# Altium PCB PCB.PcbDoc
Units mm, origin at the board's own origin, x right, y up, seen from the top; angles counter-clockwise.
Board outline 41.02 x 35.05 mm, 2 copper layers (Top Layer, Bottom Layer); 21 components, 18 nets, 96 pads, 16 vias.
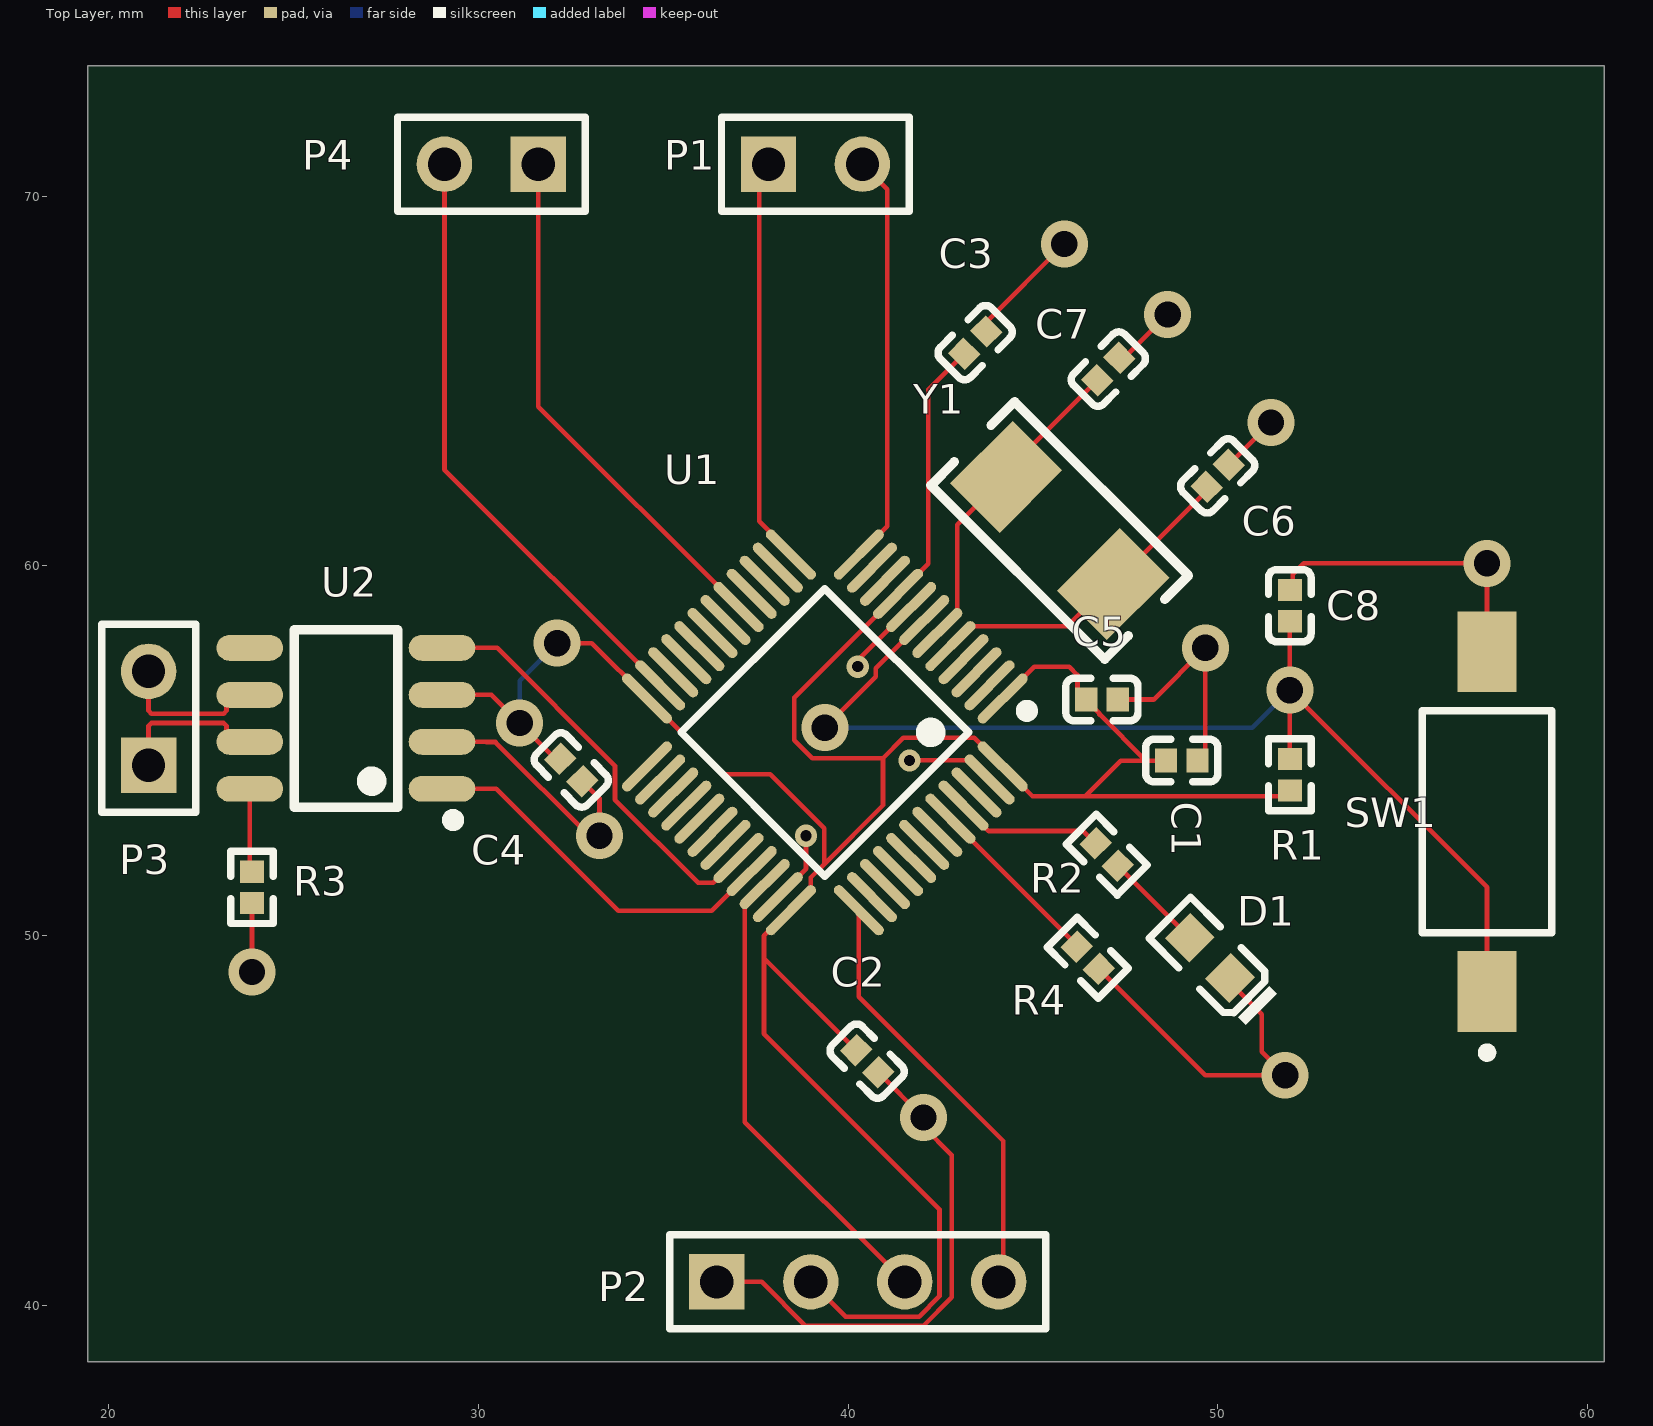
[diagram p0: Top Layer view]
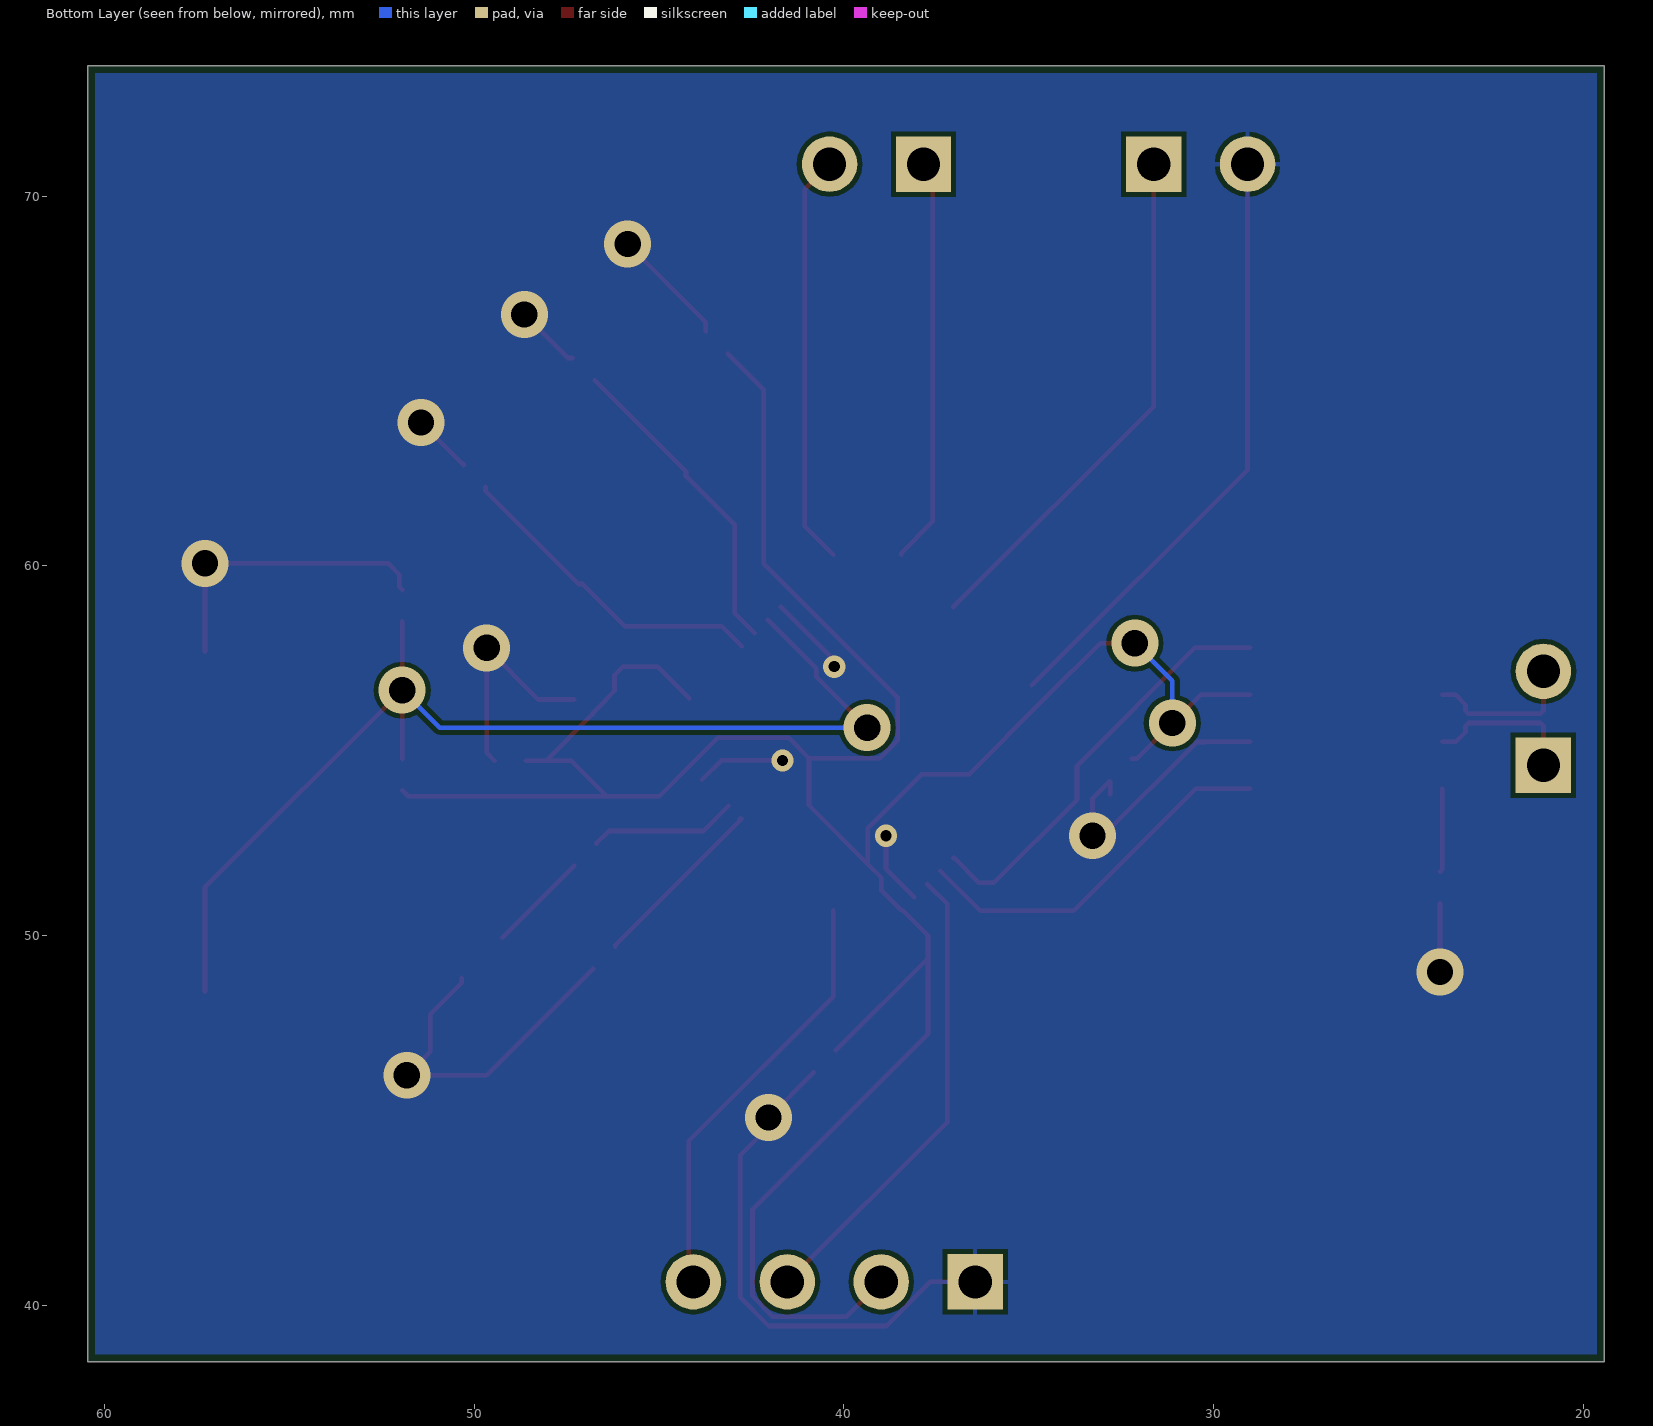
[diagram p1: Bottom Layer view, seen from below]
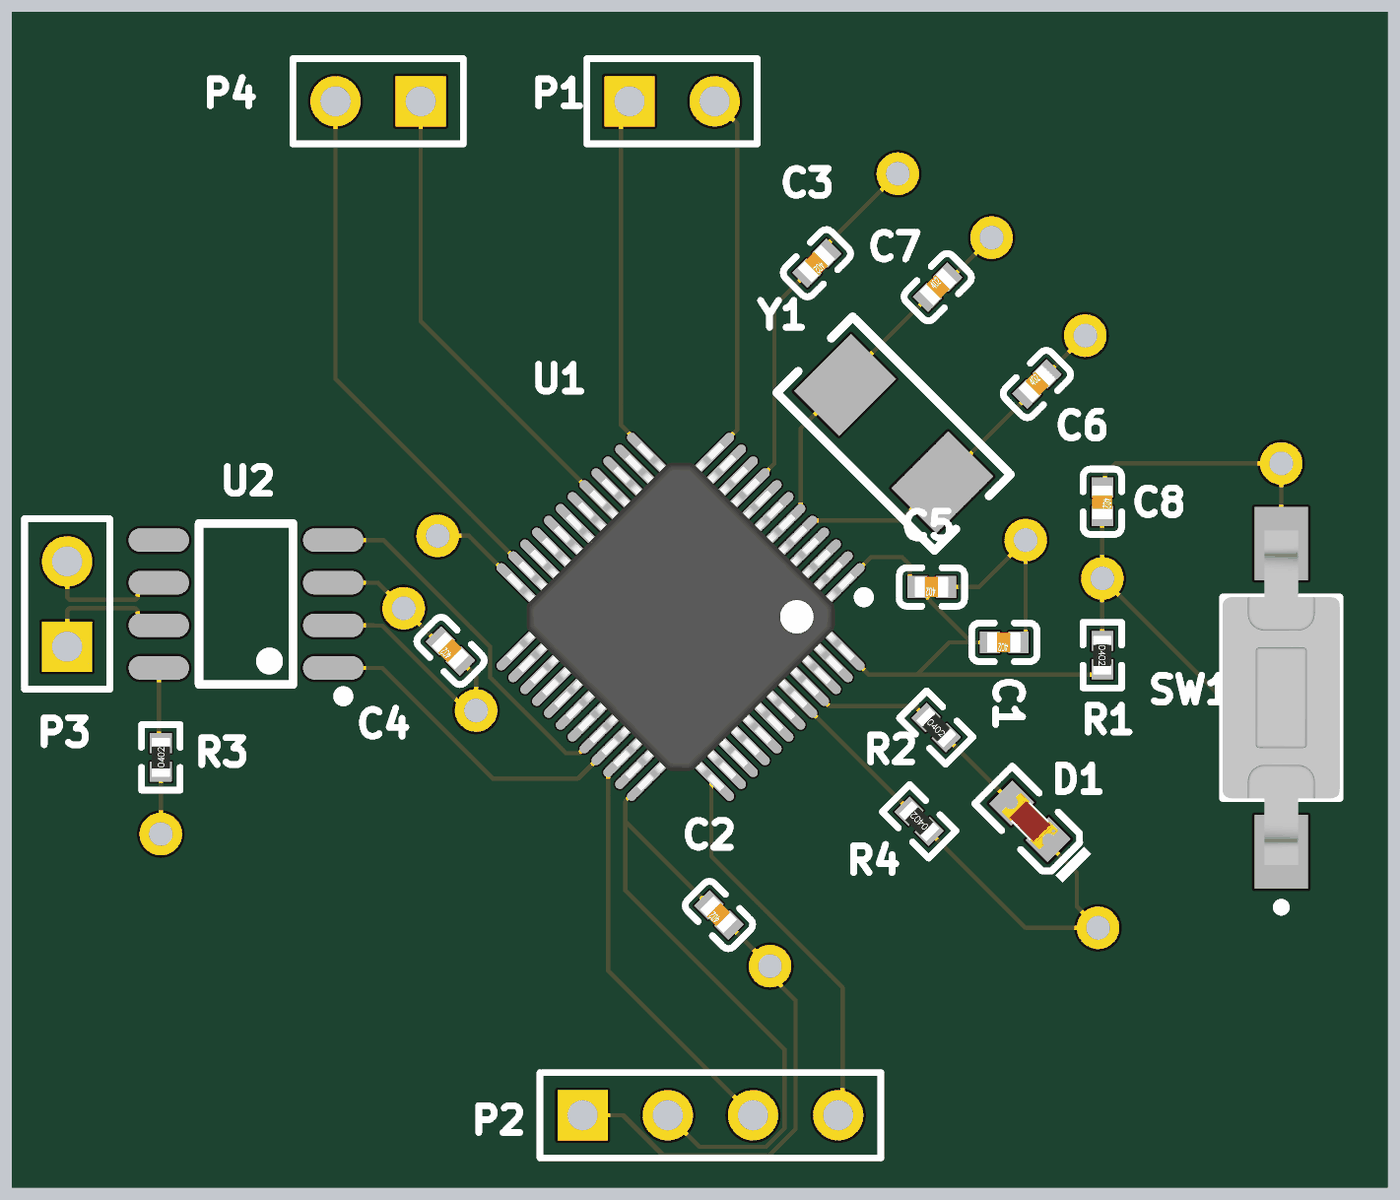
[diagram p2: 3D render of the assembled board from above, using the file's embedded part models]

## Layer stack, top to bottom
Top Solder: solder mask 0.0102, Solder Resist, Dk 3.5
Top Layer: signal copper 0.0356
Dielectric 1: dielectric 0.32, FR-4, Dk 4.8
Bottom Layer: signal copper 0.0356
Bottom Solder: solder mask 0.0102, Solder Resist, Dk 3.5

## Board outline
19.431,38.481 60.452,38.481 60.452,73.533 19.431,73.533

## Design rules (kind name [scope] priority, off if disabled: settings)
BoardOutlineClearance [All] p1: gap=0.2 ignorepadtopadclearanceinfootprint=FALSE
Clearance [All] p1: gap=0.127 ignorepadtopadclearanceinfootprint=FALSE except(0.25: Arc-Hole Track-Hole SMDPad-Hole THPad-Hole Via-Hole Fill-Hole Poly-Hole Region-Hole Text-Hole)
ComponentClearance [All] p1: gap=0.127 collisioncheckmode=3 verticalgap=0.127 showdistances=TRUE
DiffPairsRouting [All] p1: maxlimit=0.254 minlimit=0.127 mostfreqgap=0.127 toplayer_minwidth=0.127 toplayer_maxwidth=25.4 toplayer_prefwidth=0.127 bottomlayer_minwidth=0.127 bottomlayer_maxwidth=25.4 bottomlayer_prefwidth=0.127 maxuncoupledlength=12.7
Height [All] p1: minheight=0 maxheight=1816.048 prefheight=12.7
HoleSize [All] p1: absolutevalues=TRUE maxlimit=6.3 minlimit=0.3 maxpercent=80.000 minpercent=20.000
HoleToHoleClearance [All] p1: gap=0.25 allowstackedmicrovias=FALSE
MinimumAnnularRing [All] p1: minimumring=0.076
MinimumSolderMaskSliver [All] p1: minsoldermaskwidth=0
PlaneClearance [All] p1: clearance=0.127
PlaneConnect PlaneConnectPowerPads [InPadClass('PowerPads')] p1: planeconnectstyle=Direct reliefexpansion=0.508 reliefentries=4 reliefconductorwidth=0.254 reliefairgap=0.254
PlaneConnect [All] p2: pad.planeconnectstyle=Relief pad.reliefexpansion=0.3 pad.reliefentries=4 pad.reliefconductorwidth=0.127 pad.reliefairgap=0.127 via.planeconnectstyle=Direct via.reliefexpansion=0.3 via.reliefentries=4 via.reliefconductorwidth=0.127 via.reliefairgap=0.127
PolygonConnect PolygonConnectPowerPads [All vs (InPadClass('PowerPads'))] p1: connectstyle=Direct reliefconductorwidth=0.254 reliefentries=4 polygonreliefangle="90 Angle" airgapwidth=0.254
PolygonConnect [All] p2: thpad.connectstyle=Relief thpad.reliefconductorwidth=0.127 thpad.reliefentries=4 thpad.polygonreliefangle="90 Angle" thpad.airgapwidth=0.127 smdpad.connectstyle=Relief smdpad.reliefconductorwidth=0.127 smdpad.reliefentries=4 smdpad.polygonreliefangle="90 Angle" smdpad.airgapwidth=0.127 via.connectstyle=Direct via.reliefconductorwidth=0.127 via.reliefentries=4 via.polygonreliefangle="90 Angle" via.airgapwidth=0.127
RoutingVias [All] p1: holewidth=0.3 width=0.6 viastyle="Through Hole" minholewidth=0.3 minwidth=0.6 maxholewidth=0.6 maxwidth=6.6
SilkToSilkClearance [All] p1: silktosilkclearance=0
SilkToSolderMaskClearance [IsPad] p1: minsilkscreentomaskgap=0.127 clearancetoexposedcopper=TRUE
SolderMaskExpansion [All] p1: expansion=0.075 istentingtop=FALSE
Width [All] p1: maxlimit=25.4 minlimit=0.127 preferedwidth=0.127 minimp=50.000000 maximp=50.000000 favimp=50.000000
20 further rules are at their usual default settings.

## Classes and differential pairs
differential pair CAN: +CAN_P -CAN_N

## Components (designator, comment, footprint, x,y, rotation, side; value= is the part's Value field where it differs from the comment)
C1 "100nF" 0402_C 49.022,54.737 r180 top
C2 "100nF" 0402_C 40.513,46.609 r135 top
C3 "100nF" 0402_C 43.434,66.04 r225 top
C4 "100nF" 0402_C 32.512,54.483 r135 top
C5 "100nF" 0402_C 46.863,56.388 r180 top
C6 "30pF" 0402_C 49.991,62.437 r45 top
C7 "30pF" 0402_C 47.037,65.325 r45 top
C8 "100nF" 0402_C 51.943,58.928 r270 top
D1 "0603 Red" 0603_LED_S1 49.784,49.403 r135 top
P1 "Header 2" HDR1X2 37.846,70.866 r0 top
P2 "Header 4" HDR1X4 36.449,40.64 r0 top
P3 "Header 2" HDR1X2 21.082,54.61 r90 top
P4 "Header 2" HDR1X2 31.623,70.866 r180 top
R1 "100KΩ ±1%" 0402_R 51.943,54.356 r270 top
R2 "330Ω ±1%" 0402_R 46.99,52.197 r315 top
R3 "10KΩ ±1%" 0402_R 23.876,51.308 r90 top
R4 "100KΩ ±1%" 0402_R 46.482,49.403 r135 top
SW1 "FSMSM" TECO-FSMSM-2_V 57.277,53.086 r90 top
U1 "STM32F103C8T6" LQFP-48_7x7x05P 39.37,55.499 r135 top
U2 "CAN/SN65HVD230DR" SOIC-8_150mil 26.416,55.88 r90 top
Y1 "8MHz ±20ppm 20pF" SMD-5032_2P 45.72,60.96 r315 top

## Footprints (in the part's own frame and the unit in brackets; to place one, negate y for a bottom-side part, rotate by r counter-clockwise, add the part's x,y. Pads: shape width x height; smd on the part's side, far side on the other; paste and mask are expansions set on the pad)
0402_C [mm]
  rect 0.6x0.65 smd mask+0.051: 1(-0.425,0) 2(0.425,0)
  silkscreen extent -0.98,-0.58 0.98,0.58, body extent -0.48,-0.3 0.52,0.3, height 0.2
0402_R [mm]
  rect 0.6x0.65 smd mask+0.051: 1(-0.425,0) 2(0.425,0)
  silkscreen extent -0.98,-0.58 0.98,0.58, body extent -0.57,-0.27 0.58,0.28, height 0.41
0603_LED_S1 [mm]
  rect 0.93x0.98 smd: A(0.77,0) K(-0.77,0)
  silkscreen extent -1.98,-0.79 1.54,0.79, body extent -0.8,-0.4 0.8,0.4, height 0.6
HDR1X2 [mm] "Connector; Header; 2 Position"
  rect 1.5x1.5 hole 0.9: 1(0,0)
  round 1.5 hole 0.9: 2(2.54,0)
  silkscreen extent -1.27,-1.27 3.81,1.27
HDR1X4 [mm] "Connector; Header; 4 Position"
  rect 1.5x1.5 hole 0.9: 1(0,0)
  round 1.5 hole 0.9: 2(2.54,0) 3(5.08,0) 4(7.62,0)
  silkscreen extent -1.27,-1.27 8.89,1.27
LQFP-48_7x7x05P [mm]
  oval 0.28x1.8 smd mask+0.051: 1(-2.75,-4.05) 2(-2.25,-4.05) 3(-1.75,-4.05) 4(-1.25,-4.05) 5(-0.75,-4.05) 6(-0.25,-4.05) 7(0.25,-4.05) 8(0.75,-4.05) 9(1.25,-4.05) 10(1.75,-4.05) 11(2.25,-4.05) 12(2.75,-4.05) 25(2.75,4.05) 26(2.25,4.05) 27(1.75,4.05) 28(1.25,4.05) 29(0.75,4.05) 30(0.25,4.05) 31(-0.25,4.05) 32(-0.75,4.05) 33(-1.25,4.05) 34(-1.75,4.05) 35(-2.25,4.05) 36(-2.75,4.05)
  oval 1.8x0.28 smd mask+0.051: 13(4.05,-2.75) 14(4.05,-2.25) 15(4.05,-1.75) 16(4.05,-1.25) 17(4.05,-0.75) 18(4.05,-0.25) 19(4.05,0.25) 20(4.05,0.75) 21(4.05,1.25) 22(4.05,1.75) 23(4.05,2.25) 24(4.05,2.75) 37(-4.05,2.75) 38(-4.05,2.25) 39(-4.05,1.75) 40(-4.05,1.25) 41(-4.05,0.75) 42(-4.05,0.25) 43(-4.05,-0.25) 44(-4.05,-0.75) 45(-4.05,-1.25) 46(-4.05,-1.75) 47(-4.05,-2.25) 48(-4.05,-2.75)
  silkscreen extent -3.6,-4.42 2.75,2.75, body extent -4.5,-4.5 4.5,4.5, height 1.6
SMD-5032_2P [mm]
  rect 1.9x2.4 smd: 1(-2.05,0) 2(2.05,0)
  silkscreen extent -3.32,-1.6 3.32,1.6
SOIC-8_150mil [mm]
  oval 0.7x1.8 smd: 1(-1.905,-2.6) 2(-0.635,-2.6) 3(0.635,-2.6) 4(1.905,-2.6) 5(1.905,2.6) 6(0.635,2.6) 7(-0.635,2.6) 8(-1.905,2.6)
  silkscreen extent -2.9,-3.05 2.4,1.4
TECO-FSMSM-2_V [mm] "SMD, 2-Leads, Body 6x3.5mm, Pitch 9.19mm"
  rect 2.2x1.6 smd: 1(-4.595,0)
  rect 2.18x1.6 smd: 2(4.595,0)
  silkscreen extent -6.37,-1.75 3,1.75, body extent -4.98,-1.75 4.98,1.75, height 4.4

## Part data
C1 C2 C3 C4 C5 C8: library part "0402 100nF (104) 10% 16V", "Chip capacitors", Manufacturer="Samsung Electro-Mechanics", Package=0402, PartNumber=CL05B104KO5NNNC, SuppliersPartNumber=C1525, Tolerance=10%, Voltage=16V, Capacitance=100nF, ComponentLink1Description="Supplier link", ComponentLink1URL=http://www.szlcsc.com/product/details_1877.html, Supplier=LC
C6 C7: library part "0402 30pF (300) 5% 50V", "Chip capacitors", Manufacturer="Guangdong Fenghua Advanced Tech", Package=0402, PartNumber=0402CG300J500NT, SuppliersPartNumber=C1570, Tolerance=5%, Voltage=50V, Capacitance=30pF, ComponentLink1Description="Supplier link", ComponentLink1URL=http://www.szlcsc.com/product/details_1922.html, Supplier=LC
D1: library part "0603 LED Red", "LED", Color=Red, Package=0603, SuppliersPartNumber=C2286, ComponentLink1Description=供应商链接, ComponentLink1URL=http://www.szlcsc.com/product/details_2659.html, Supplier=LC
P1 P3 P4: "Header, 2-Pin", LatestRevisionDate=17-Jul-2002, LatestRevisionNote="Re-released for DXP Platform.", Publisher="Altium Limited"
P2: "Header, 4-Pin", LatestRevisionDate=17-Jul-2002, LatestRevisionNote="Re-released for DXP Platform.", Publisher="Altium Limited"
R1 R4: library part "0402 100K (1003) 1%", "Chip resistor", Manufacturer="Uniroyal Elec", Package=0402, PartNumber=0402WGF1003TCE, Power=1/16W, Resistance=100KΩ, SuppliersPartNumber=C25741, Tolerance=1%, ComponentLink1Description="Supplier link", ComponentLink1URL=http://www.szlcsc.com/product/details_26484.html, Supplier=LC
R2: library part "0402 330R (3300) 1%", "Chip resistor", Manufacturer="Uniroyal Elec", Package=0402, PartNumber=0402WGF3300TCE, Power=1/16W, Resistance=330Ω, SuppliersPartNumber=C25104, Tolerance=1%, ComponentLink1Description="Supplier link", ComponentLink1URL=http://www.szlcsc.com/product/details_25847.html, Supplier=LC
R3: library part "0402 10K (1002) 1%", "Chip resistor", Manufacturer="Uniroyal Elec", Package=0402, PartNumber=0402WGF1002TCE, Power=1/16W, Resistance=10KΩ, SuppliersPartNumber=C25744, Tolerance=1%, ComponentLink1Description="Supplier link", ComponentLink1URL=http://www.szlcsc.com/product/details_26487.html, Supplier=LC
SW1: library part CMP-2000-07511-1, "FSMSM Push Button Switch, 50 mA, -35 to 85 degC, 2-Pin SMD, RoHS, Bulk", Case\/Package=SMD/SMT, Contact Current Rating=50mA, Contact Resistance=100mOhm, Manufacturer="TE Connectivity", Max Operating Temperature=85degC, Max Voltage Rating (DC)=12V, Min Operating Temperature=-35degC, Operating Force=180gf, Package Description="2-Pin Surface Mount Device, Body 6 x 3.5 mm, Pitch 9.19 mm", Package Quantity=1000, Voltage Rating (DC)=24V, Actuator Length=1.07mm, Actuator Material=Polyamide, Contact Material=Brass, Contact Plating=Silver, Current Rating=50mA, Datasheet URL=http://www.te.com/commerce/DocumentDelivery/DDEController?Action=showdoc&DocId=Customer+Drawing%7F1437566-3%7FC2%7Fpdf%7FEnglish%7FENG_CD_1437566-3_C2_1437566_3_1_c.dwg.pdf%7F1437566-3, Datasheet Version="Rev. C2, 08/2014", Electrical Life=20000Cycles, ELV=Compliant, Illumination Type=Illuminated, Lead Free=LeadFree, Manufacturer URL=http://www.te.com/, Mechanical Life=20000Cycles, Mount=SurfaceMount, Mounting Technology=SurfaceMount, Orientation=Straight, Package Reference=FSMSM, Packaging=LoosePiece, REACH SVHC=Unknown, RoHSCompliant=true, Switch Travel=0.25mm, Termination=GullWing, Throw Configuration=SPST
U1: "ARM", Package=LQFP-48_7x7x05P, SuppliersPartNumber=C8734, ComponentLink1Description=供应商链接, ComponentLink1URL=http://www.szlcsc.com/product/details_9243.html, Supplier=LC
U2: library part CAN/SN65HVD230DR_[C12084], "CAN", Package=SOIC-8_150mil, SuppliersPartNumber=C12084, ComponentLink1Description=供应商链接, ComponentLink1URL=http://www.szlcsc.com/product/details_12661.html, Supplier=LC
Y1: library part "SMD-5032_2P 8MHz 20ppm 20pF", "贴片晶振", Package=SMD-5032_2P, SuppliersPartNumber=C115962, ComponentLink1Description=供应商链接, ComponentLink1URL=http://www.szlcsc.com/product/details_117214.html, Supplier=LC

## Via types
v1: diameter 1.27, hole 0.711, Top Layer to Bottom Layer, 13 vias
v2: diameter 0.6, hole 0.3, Top Layer to Bottom Layer, 3 vias

## Nets (pads, with @x,y where several pads share a name; then routed paths per layer and width w, separated by ;. In a path a pad name is that pad's centre, name@x,y a point inside that pad or via, vN(x,y) a via of type N, cw(c..) or ccw(c..) an arc to the next point about the centre after c; other vN are vias at no path point)
BOOT0: R4.2 U1.44 | length 4.9
  Top Layer w0.127: U1.44@42.805,53.166 U1.44 46.181,49.748 R4.2
CAN_N: P3.2 U2.6 | length 4.1
  Top Layer w0.127: P3.2 21.082,56.081 21.156,56.007 23.115,56.007 23.189,56.081 23.189,56.25 23.454,56.515 U2.6
CAN_P: P3.1 U2.7 | length 4.1
  Top Layer w0.127: P3.1 21.082,55.679 21.156,55.753 23.115,55.753 23.189,55.679 23.189,55.51 23.454,55.245 U2.7
CAN_RX: U1.32 U2.4 | length 11.5
  Top Layer w0.127: U2.4 30.504,57.785 33.694,54.596 33.694,53.682 35.941,51.435 36.348,51.435 37.018,52.105 U1.32
CAN_TX: U1.33 U2.1 | length 10.2
  Top Layer w0.127: U2.1 30.48,53.975 33.782,50.673 36.312,50.673 U1.33
GND: C1.1 C2.1 C3.1 C4.1 C5.1 C6.2 C7.2 C8.1 D1.K P2.1 P4.2 R3.1 R4.1 SW1.2 U1.8 U1.23 U1.35 U1.47 U2.2 | length 76.9
  Top Layer w0.127: v1(23.876,49.022) R3.1 ; U2.2 30.214,55.245 30.221,55.238 30.462,55.238 32.996,52.705 v1(33.274,52.705) 33.274,53.721 C4.1 32.795,54.165 C4.1@32.795,53.83 ; P4.2 29.083,62.604 U1.23 ; P2.1 37.659,40.64 38.853,39.445 42.024,39.445 42.799,40.221 42.799,44.069 42.037,44.831 v1(42.037,45.085) C2.1 ; U1.35 38.862,51.809 v2(38.862,52.705) ; v2(40.259,57.277) 40.35,57.368 40.35,57.539 U1.8 ; v2(41.656,54.737) 41.669,54.75 43.301,54.75 U1.47 ; C3.1 43.735,66.595 v1(45.847,68.707) ; R4.1 49.657,46.228 v1(51.816,46.228) 51.181,46.863 51.181,47.879 50.328,48.732 D1.K ; C5.1 48.26,56.388 v1(49.657,57.785) 49.657,54.947 C1.1 ; C7.2 47.464,65.625 v1(48.641,66.802) ; v1(51.435,63.881) C6.2 ; C8.1 52.022,59.432 52.022,59.769 52.324,60.071 v1(57.277,60.071) SW1.2 ; C6.2 50.274,62.72 50.274,62.756 C6.2
NetD1_A: D1.A R2.2 | length 2.8
  Top Layer w0.127: R2.2 D1.A
NetP4_1: P4.1 U1.17 | length 14.2
  Top Layer w0.127: P4.1 31.623,64.307 U1.17
NetR2_1: R2.1 U1.45 | length 4
  Top Layer w0.127: U1.45@43.119,53.519 43.806,52.832 46.355,52.832 R2.1
NetR3_2: R3.2 U2.8 | length 2.3
  Top Layer w0.127: U2.8 23.816,51.793 R3.2
OSC_IN: C6.1 U1.5 Y1.2 | length 8.8
  Top Layer w0.127: U1.5 43.302,58.37 45.924,58.37 47.064,59.51 Y1.2 49.691,62.032 C6.1
OSC_OUT: C7.1 U1.6 Y1.1 | length 8.6
  Top Layer w0.127: U1.6 42.948,58.723 42.948,61.109 44.249,62.41 Y1.1 44.27,62.558 C7.1
RST: C8.2 R1.1 SW1.1 U1.7 | length 31.1
  Top Layer w0.127: v1(39.37,55.626) 40.749,57.005 40.749,57.232 U1.7 ; R1.1 v1(51.943,56.642) ; C8.2 v1(51.943,56.642) ; SW1.1 57.277,51.308 v1(51.943,56.642)
  Bottom Layer w0.127: v1(39.37,55.626) 50.927,55.626 v1(51.943,56.642)
SWCLK: P2.4 U1.37 | length 11.7
  Top Layer w0.127: U1.37 40.289,48.357 44.196,44.45 44.196,40.767 P2.4
SWDIO: P2.3 U1.34 | length 12.8
  Top Layer w0.127: U1.34 37.206,50.86 37.206,44.963 P2.3
UART_RX: P1.1 U1.13 | length 11
  Top Layer w0.127: P1.1 37.592,70.612 37.592,61.207 38.451,60.349 U1.13
UART_TX: P1.2 U1.12 | length 11.2
  Top Layer w0.127: U1.12 41.06,61.078 41.06,70.192 P1.2
VCC3V3: C1.2 C2.2 C3.2 C4.2 C5.2 P2.2 R1.2 U1.1 U1.9 U1.24 U1.36 U1.48 U2.3 | length 77.3
  Top Layer w0.127: U2.3 30.353,56.515 v1(31.115,55.753) 32.084,54.784 C4.2 ; v1(32.131,57.912) 33.068,57.912 U1.24 36.61,54.37 37.891,54.37 39.352,52.908 39.352,51.94 ; P2.2 39.93,39.699 41.919,39.699 42.47,40.25 42.47,42.602 37.723,47.349 37.723,49.399 ; C2.2 37.723,49.399 ; C3.2 42.164,64.77 42.164,60.061 U1.9 38.544,56.441 38.544,55.284 39.028,54.8 40.942,54.8 ; U1.1 45.037,57.277 45.974,57.277 46.201,57.05 46.201,56.624 C5.2 46.438,56.363 46.798,56.003 46.798,55.984 48.045,54.737 ; C1.2 48.045,54.737 ; R1.2 51.785,53.773 46.407,53.773 ; 37.723,49.399 37.723,50.002 38.412,50.691 U1.36 38.988,51.228 38.988,51.576 39.352,51.94 ; 39.352,51.94 40.942,53.53 40.942,54.8 ; 40.942,54.8 41.493,55.351 43.407,55.351 U1.48 44.985,53.773 46.407,53.773 ; 46.407,53.773 47.371,54.737 48.045,54.737
  Bottom Layer w0.127: v1(31.115,55.753) 31.115,56.896 v1(32.131,57.912)
pads on no net: U1.2 U1.3 U1.4 U1.10 U1.11 U1.14 U1.15 U1.16 U1.18 U1.19 U1.20 U1.21 U1.22 U1.25 U1.26 U1.27 U1.28 U1.29 U1.30 U1.31 U1.38 U1.39 U1.40 U1.41 U1.42 U1.43 U1.46 U2.5

## Polygon pours and split planes (outlines as drawn)
no net on Top Layer "NONET_L01_P000" (solid, pour order 0): 22.225,70.358
GND on Bottom Layer "GND_L02_P001" (solid, pour order 1): 19.05,74.168 18.796,73.914 18.796,37.973 60.96,37.973 61.087,38.1 60.706,38.481 60.706,74.168

## Other copper
Top Layer:
  pour cut-out: 21.717,47.625